# Altium PCB 1081.PcbDoc
Units mil, origin at the board's own origin, x right, y up, seen from the top; angles counter-clockwise.
Board outline 5010 x 1510 mil, 2 copper layers (Top Layer, Bottom Layer); 7 components, 15 nets, 35 pads, 6 vias.
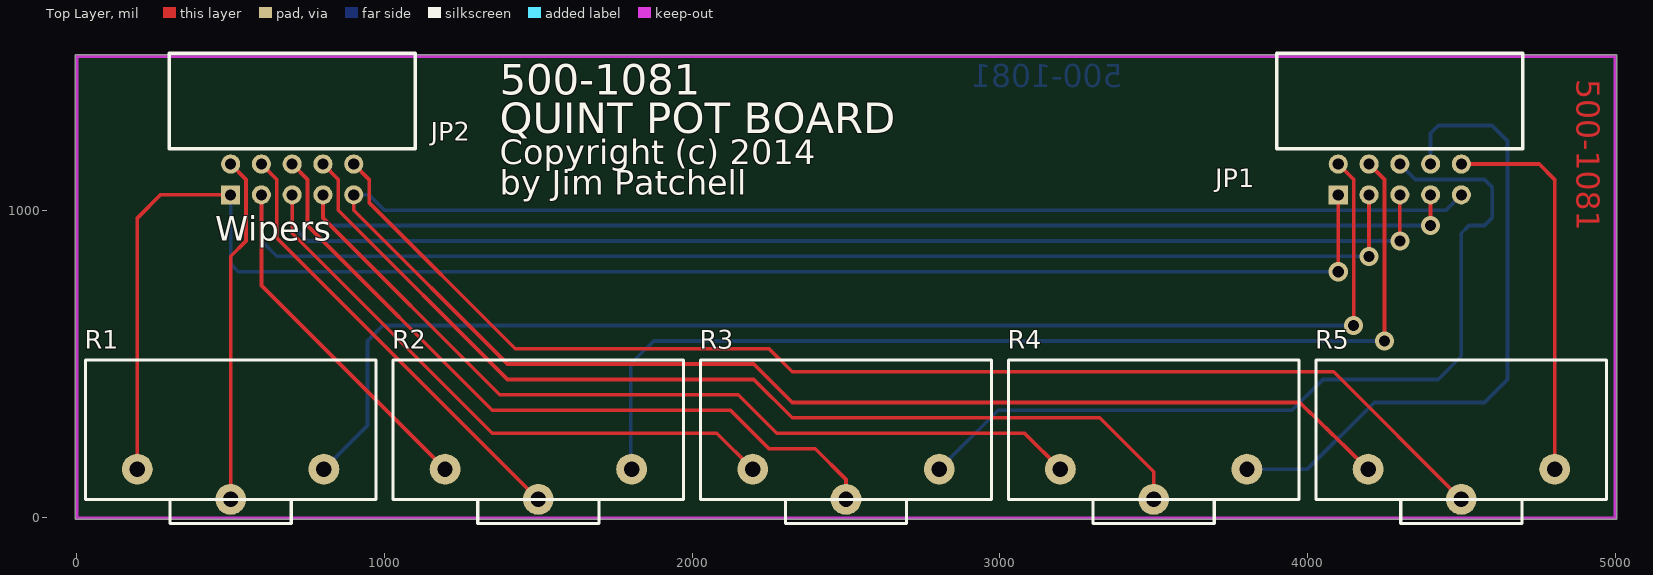
[diagram p0: Top Layer view]
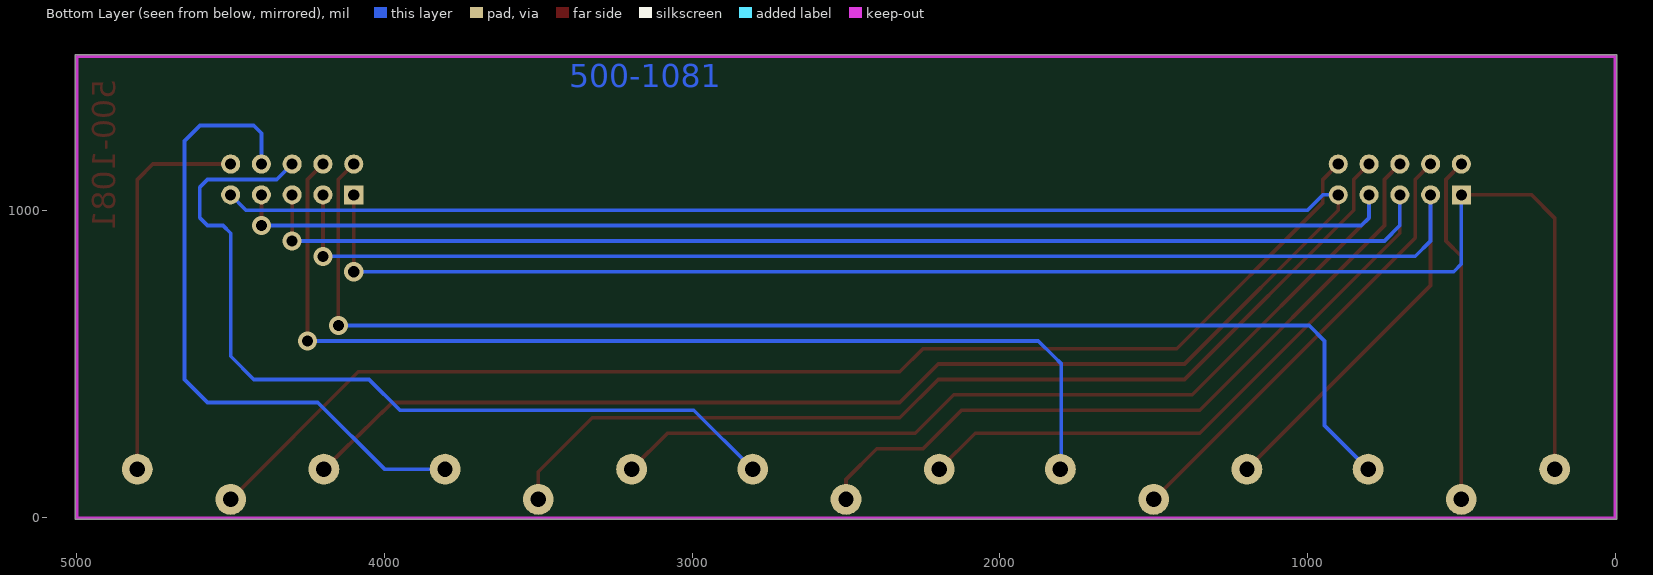
[diagram p1: Bottom Layer view, seen from below]

## Layer stack, top to bottom
Top Layer: signal copper 1.4
Dielectric: dielectric 12.6, FR-4, Dk 4.8
Bottom Layer: signal copper 1.4

## Board outline
-5,-5 5005,-5 5005,1505 -5,1505

## Design rules (kind name [scope] priority, off if disabled: settings)
Clearance [All] p1: gap=10
PlaneClearance [All] p1: clearance=10
PolygonConnect [All] p1: connectstyle=Relief reliefconductorwidth=10 reliefentries=4 polygonreliefangle="90 Angle"
RoutingPriority [All] p1: routingpriority=2
RoutingVias [All] p1: holewidth=20 width=50 viastyle="Through Hole" minholewidth=28 minwidth=50 maxholewidth=28 maxwidth=50
SilkscreenOverComponentPads [All] p1: minsilkscreentomaskgap=10
SolderMaskExpansion [All] p1: expansion=2
TestPointUsage [All] p1: valid=0 allowmultiple=FALSE
Testpoint [All] p1: side=15 testpointundercomponent=TRUE minsize=40 maxsize=100 preferedsize=60 minholesize=0 maxholesize=40 preferedholesize=32 testpointgrid=1 style=1023 order=0123456789
Width [All] p1: maxlimit=10 minlimit=10 preferedwidth=10
21 further rules are at their usual default settings.

## Components (designator, comment, footprint, x,y, rotation, side; value= is the part's Value field where it differs from the comment)
JP1 "HEADER 5X2" IDC10-AMP-RA 4100,1050 r0 top
JP2 "HEADER 5X2" IDC10-AMP-RA 500,1050 r0 top
R1 "POT" "ALPHA POT V" 500,60 r0 top
R2 "POT" "ALPHA POT V" 1500,60 r0 top
R3 "POT" "ALPHA POT V" 2500,60 r0 top
R4 "POT" "ALPHA POT V" 3500,60 r0 top
R5 "POT" "ALPHA POT V" 4500,60 r0 top

## Footprints (in the part's own frame and the unit in brackets; to place one, negate y for a bottom-side part, rotate by r counter-clockwise, add the part's x,y. Pads: shape width x height; smd on the part's side, far side on the other; paste and mask are expansions set on the pad)
"ALPHA POT V" [mm]
  round 2.54 hole 1.27: A(7.7,2.5) B(-7.7,2.5) WIPE(0,0)
  silkscreen extent -12,-2 12,11.5
IDC10-AMP-RA [mil]
  rect 62x62 hole 36: 1(0,0)
  round 62 hole 36: 2(0,100) 3(100,0) 4(100,100) 5(200,0) 6(200,100) 7(300,0) 8(300,100) 9(400,0) 10(400,100)
  silkscreen extent -200,150 600,460

## Via types
v1: diameter 62, hole 36, Top Layer to Bottom Layer, 6 vias

## Nets (pads, with @x,y where several pads share a name; then routed paths per layer and width w, separated by ;. In a path a pad name is that pad's centre, name@x,y a point inside that pad or via, vN(x,y) a via of type N, cw(c..) or ccw(c..) an arc to the next point about the centre after c; other vN are vias at no path point)
H1: JP1.2 R1.A | length 4246.9
  Top Layer w12: JP1.2 4150,1100 v1(4150,625)
  Bottom Layer w12: R1.A 944.72,300 944.72,575 994.72,625 v1(4150,625)
H2: JP1.4 R2.A | length 3471.1
  Top Layer w12: JP1.4 4250,1100 v1(4250,575)
  Bottom Layer w12: R2.A 1800,150 1825,150 1800,175 1800,500 1825,525 1875,575 v1(4250,575)
H3: JP1.6 R3.A | length 2800.5
  Bottom Layer w12: R3.A 2994.72,350 3950,350 4050,450 4425,450 4500,525 4500,925 4525,950 4575,950 4600,975 4600,1075 4575,1100 4350,1100 JP1.6
H4: JP1.8 R4.A | length 2123.7
  Bottom Layer w12: R4.A 4000,158.43 4216.57,375 4575,375 4650,450 4650,1225 4600,1275 4425,1275 4400,1250 JP1.8
H5: JP1.10 R5.A | length 1265.4
  Top Layer w12: JP1.10 4753.15,1150 4803.15,1100 R5.A
L1: JP1.1 JP2.1 R1.B | length 5236.1
  Top Layer w12: R1.B 196.85,975 271.85,1050 JP2.1 ; v1(4100,800) JP1.1
  Bottom Layer w12: JP2.1 500,825 525,800 v1(4100,800)
L2: JP1.3 JP2.3 R2.B | length 5109.5
  Top Layer w12: JP2.3 600,755.28 R2.B ; v1(4200,850) JP1.3
  Bottom Layer w12: JP2.3 600,900 650,850 v1(4200,850)
L3: JP1.5 JP2.5 R3.B | length 5810.1
  Top Layer w12: JP2.5 700,925 1350,275 2080.28,275 R3.B ; v1(4300,900) JP1.5
  Bottom Layer w12: JP2.5 700,950 750,900 v1(4300,900)
L4: JP1.7 JP2.7 R4.B | length 6595.4
  Top Layer w12: JP2.7 800,975 1375,400 2150,400 2275,275 3080.28,275 R4.B ; v1(4400,950) JP1.7
  Bottom Layer w12: JP2.7 800,975 825,950 v1(4400,950)
L5: JP1.9 JP2.9 R5.B | length 7335.3
  Top Layer w12: JP2.9 900,1000 1400,500 2200,500 2325,375 3975,375 R5.B
  Bottom Layer w12: JP2.9 950,1050 1000,1000 4450,1000 JP1.9
W1: JP2.2 R1.WIPE | length 1131.4
  Top Layer w12: R1.WIPE 500,850 550,900 550,1100 JP2.2
W2: JP2.4 R2.WIPE | length 1462.8
  Top Layer w12: JP2.4 650,1100 650,910 R2.WIPE
W3: JP2.6 R3.WIPE | length 2377.4
  Top Layer w12: JP2.6 750,1100 750,950 1350,350 2125,350 2250,225 2400,225 2500,125 R3.WIPE
W4: JP2.8 R4.WIPE | length 3282.8
  Top Layer w12: JP2.8 850,1100 850,1000 1400,450 2200,450 2325,325 3325,325 3500,150 3500,50 R4.WIPE
W5: JP2.10 R5.WIPE | length 4095.4
  Top Layer w12: JP2.10 950,1100 950,1025 1425,550 2250,550 2325,475 4085,475 R5.WIPE

## Keep-outs
Keep-Out Layer:
  lines w10: 0,0 0,1500 5000,1500 5000,0 0,0

## Other copper
Top Layer:
  text "500-1081-02 REV A COMPONENT SIDE" at 2175,1800 h100
  text "500-1081" at 4875,1425 h75 r270
Bottom Layer:
  text "500-1081-01 REV A CIRCUIT SIDE" at 5025,1650 h100
  text "500-1081" at 3400,1400 h75

## Silkscreen, mask and mechanical layers (free items; w line width, h text height)
Top Overlay:
  text "500-1081-04 REV A COMPOENT LEGEND" at 2150,2075 h100
  text "500-1081" at 1375,1375 h100
  text "QUINT POT BOARD" at 1375,1250 h100
  text "Copyright (c) 2014" at 1375,1150 h80
  text "by Jim Patchell" at 1375,1050 h80
  text "Wipers" at 450,900 h80
Bottom Solder:
  text "500-1081-03 REV A TOP/BOTTOM SOLDER MASK" at 2150,1950 h100
Mechanical 1:
  lines w10: 0,0 0,1500 5000,1500 5000,0 0,0
Drill Drawing:
  lines w12: 0,-325 0,-275 ; 106.86,-335.62 0,-300 ; 106.86,-264.38 0,-300 ; 2178.32,-300 0,-300 ; 2821.68,-300 5000,-300 ; 4893.14,-335.62 5000,-300 ; 4893.14,-264.38 5000,-300 ; 5000,-325 5000,-275 ; 5139.38,106.86 5175,0 ; 5139.38,1393.14 5175,1500 ; 5150,0 5200,0 ; 5150,1500 5200,1500 ; 5175,436.65 5175,0 ; 5175,1063.35 5175,1500 ; 5210.62,106.86 5175,0 ; 5210.62,1393.14 5175,1500
  text "500-1081-05 REV A FAB DRAWING" at 2150,2200 h100
  text "1500mil" at 5121.57,1053.35 h100 r270
  text ".LEGEND" at 5525,100 h100
  text "5000mil" at 2188.32,-353.43 h100